# EAGLE board ttl_rs485_fd_v1b (EAGLE 5.07)
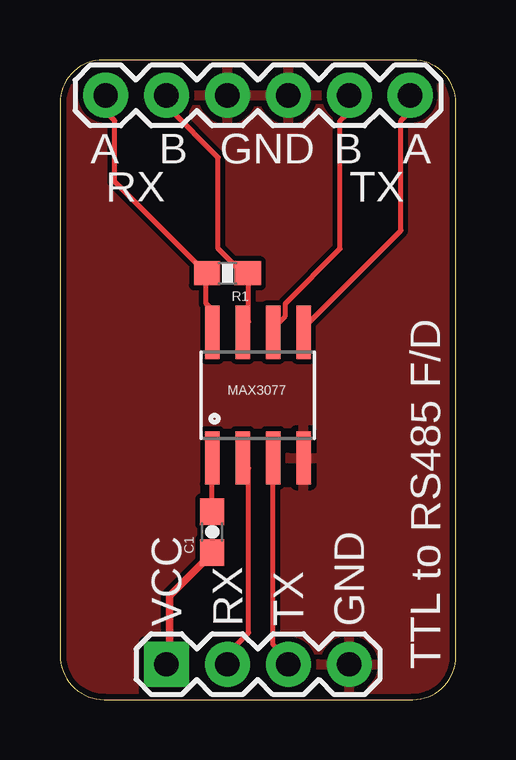
[diagram p0: board, top side]
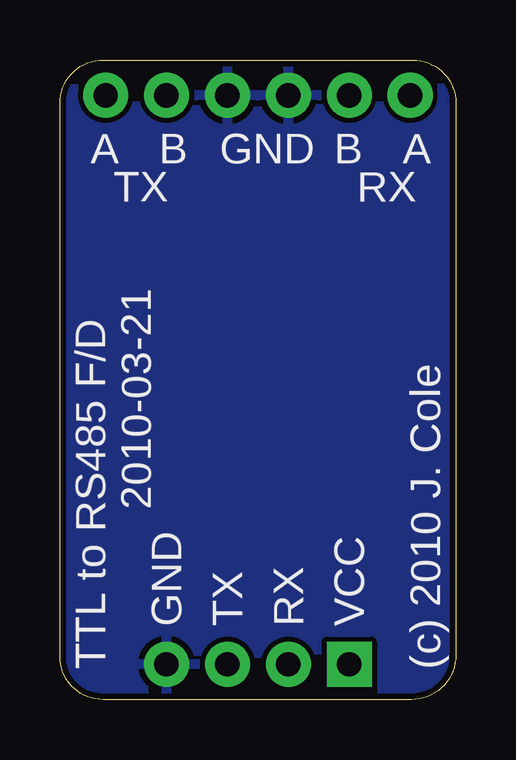
[diagram p1: board, bottom side, seen from below]

Size 16.51 x 26.67 mm. Coordinates in mm from the lower left corner, seen from the top.
Outline: 14.71,0 arc90 16.51,1.8 16.51,24.87 arc90 14.71,26.67 1.8,26.67 arc90 0,24.87 0,1.85 arc90 1.85,0 14.71,0
Copper layers (1*16): Top 0.035mm / dielectric 1.5mm / Bottom 0.035mm
Design rules "SparkFun": minimum track width 8mil, minimum drill 20mil, track to track 8mil, track to pad 8mil, pad to pad 8mil, via to via 8mil, smd to smd 8mil, copper to edge 10mil, drill to drill 8mil, minimum pad ring 12mil, minimum via ring 10mil, stop-mask expansion 4mil, vias tented up to drill 25mil, thermal gap 10mil
Net classes: 0 signal: width 0.203 mm; 1 supply: width 0.305 mm

## Footprints (pad centres in the part's own frame; a part is rotated, then mirrored left to right if it is on the bottom)
0603-CAP = smd 1.1 x 1: 1 -0.85,0; 2 0.85,0
SO08 = smd 0.61 x 2.21: 1 -1.905,-2.616; 2 -0.635,-2.616; 3 0.635,-2.616; 4 1.905,-2.616; 5 1.905,2.616; 6 0.635,2.616; 7 -0.635,2.616; 8 -1.905,2.616
0603-RES = smd 1.1 x 1: 1 -0.85,0; 2 0.85,0
1X06 = drill 1.016 pad 1.88 round: 1 0,0; 2 2.54,0; 3 5.08,0; 4 7.62,0; 5 10.16,0; 6 12.7,0
1X04 = drill 1.016 pad 1.88 square: 1 0,0 | drill 1.016 pad 1.88 round: 2 2.54,0; 3 5.08,0; 4 7.62,0

## Placement (x,y rotation side)
C1  0.1uF  [0603-CAP]  6.35,6.99 90 top
MAX3077  MAX3087  [SO08]  8.26,12.7 0 top
R1  220  [0603-RES]  6.99,17.78 180 top
RS485  M06 Header  [1X06]  1.91,25.2 0 top
TTL  M04 Header  [1X04]  4.45,1.47 0 top

## Library data of the parts
C1 R1 RS485 TTL = SparkFun
MAX3077 = jcole

## Nets
A: MAX3077.8 R1.2 RS485.1
B: MAX3077.7 R1.1 RS485.2
GND [supply]: MAX3077.4 RS485.3 RS485.4 TTL.4
N$1: C1.2 MAX3077.1
RXD: MAX3077.2 TTL.2
TXD: MAX3077.3 TTL.3
VCC [supply]: C1.1 TTL.1
Y: MAX3077.5 RS485.6
Z: MAX3077.6 RS485.5

## Tracks (layer width: path | path; a pad name or v marks a point on that pad's centre or on a via)
A
  Top 0.203: 6.1,17.78 6.1,16.51 6.35,16.26 MAX3077.8 | 6.1,17.78 2.29,21.59 2.29,24.13 2.03,24.38 2.03,25.15 RS485.1 | 6.1,17.78 R1.2
B
  Top 0.203: MAX3077.7 7.62,15.49 7.87,15.75 7.87,17.78 R1.1 7.62,17.78 6.6,18.8 6.6,22.61 4.57,24.64 4.57,25.15 RS485.2
GND
  pour Bottom: 0.2,0.2 16.31,0.2 16.31,26.47 0.2,26.47
  pour Top: 0.2,0.2 16.31,0.2 16.31,26.47 0.2,26.47
N$1
  Top 0.203: C1.2 MAX3077.1
RXD
  Top 0.203: MAX3077.2 7.62,9.91 7.87,9.65 7.87,2.79 7.11,2.03 7.11,1.52 TTL.2
TXD
  Top 0.203: MAX3077.3 8.89,2.29 9.4,1.78 9.4,1.52 TTL.3
VCC
  Top 0.305: C1.1 6.35,6.1 4.57,4.32 4.57,1.52 TTL.1
Y
  Top 0.203: MAX3077.5 10.16,15.49 14.22,19.56 14.22,24.13 14.48,24.38 14.48,25.15 RS485.6
Z
  Top 0.203: MAX3077.6 8.89,15.49 9.4,16 9.4,16.51 11.68,18.8 11.68,24.13 11.94,24.38 11.94,25.15 RS485.5

## Text on the board
tPlace: A | B | GND | B | A | RX | TX | VCC | RX | TX | GND | TTL to RS485 F/D
bPlace: A | B | GND | B | A | RX | TX | 2010-03-21 | VCC | RX | TX | GND | (c) 2010 J. Cole | TTL to RS485 F/D